# Altium PCB LED_BOARD.PcbDoc
Units mm, origin at the board's own origin, x right, y up, seen from the top; angles counter-clockwise.
Board outline 33.99 x 32.78 mm, 2 copper layers (Top Layer, Bottom Layer); 8 components, 11 nets, 24 pads, 0 vias.
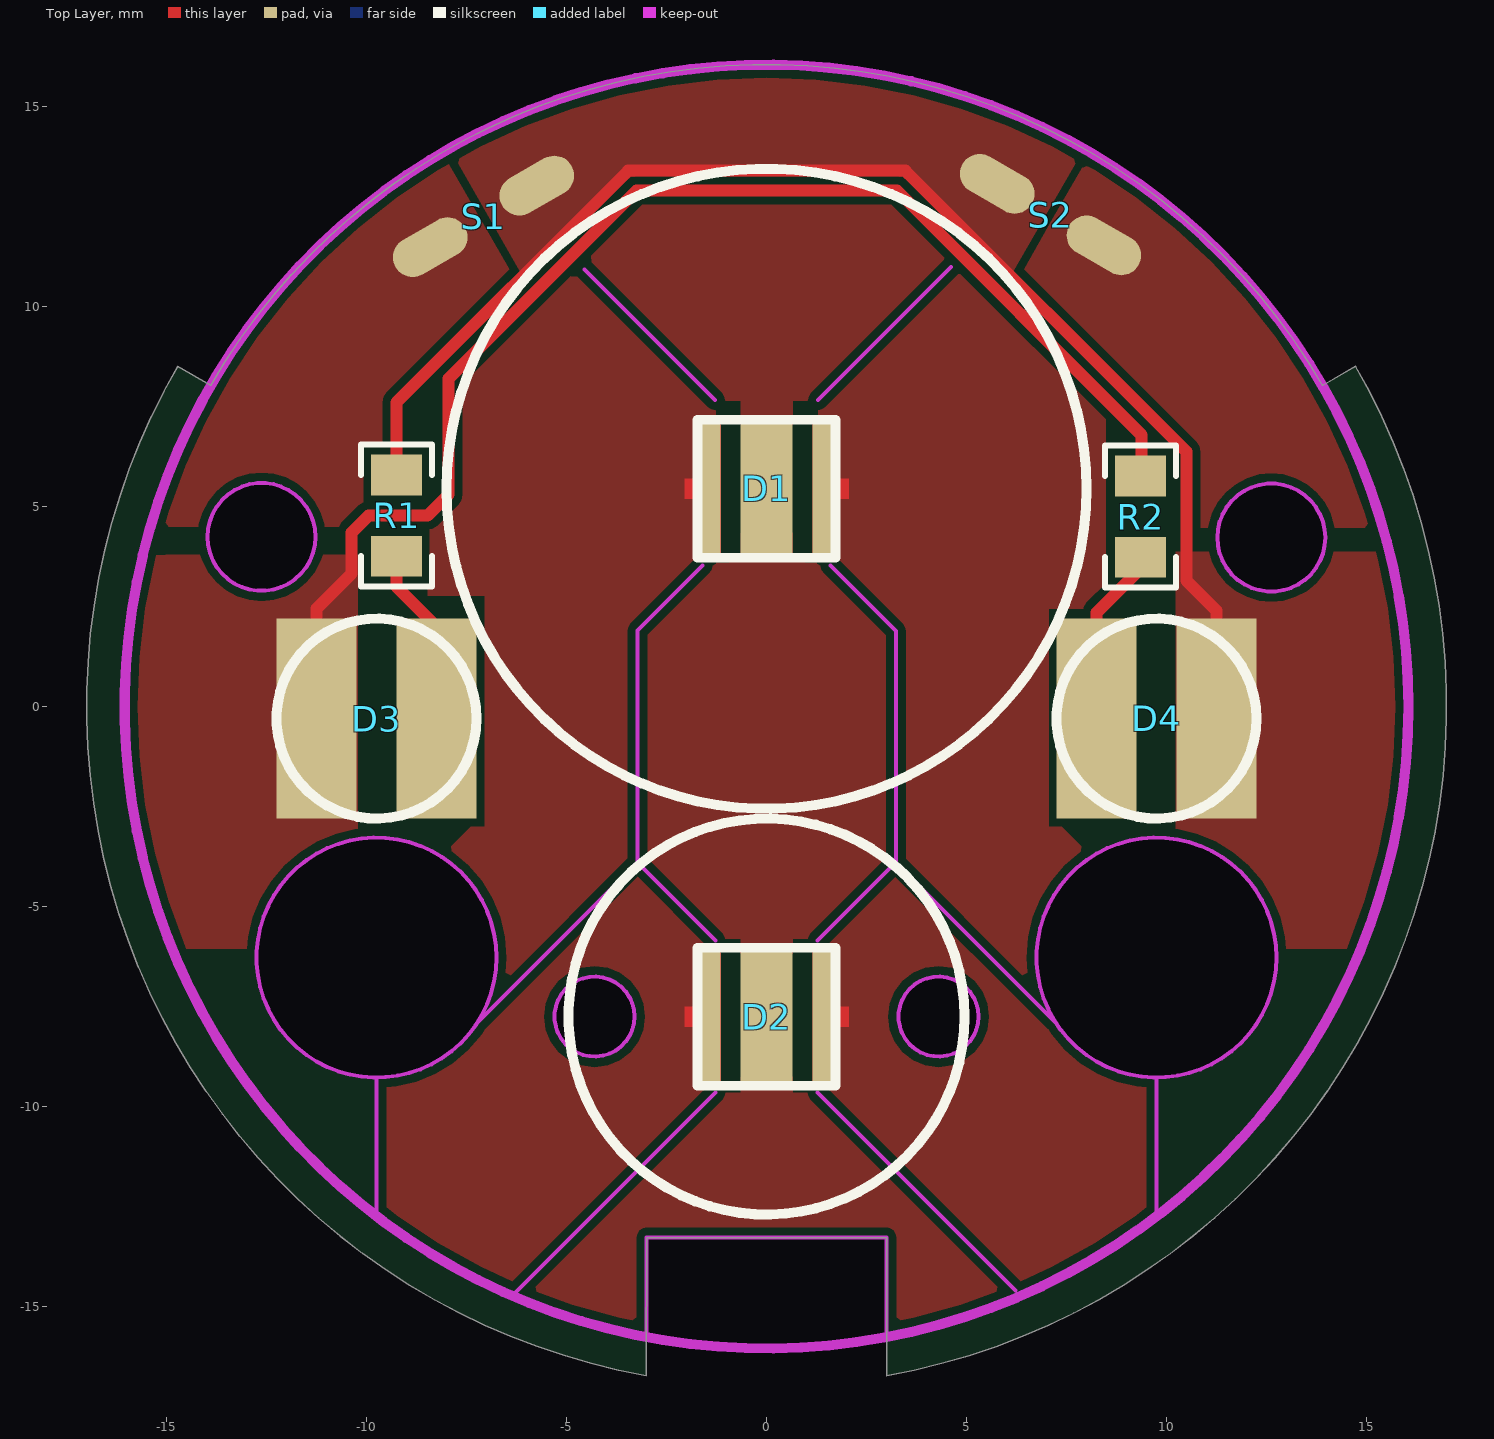
[diagram p0: Top Layer view]
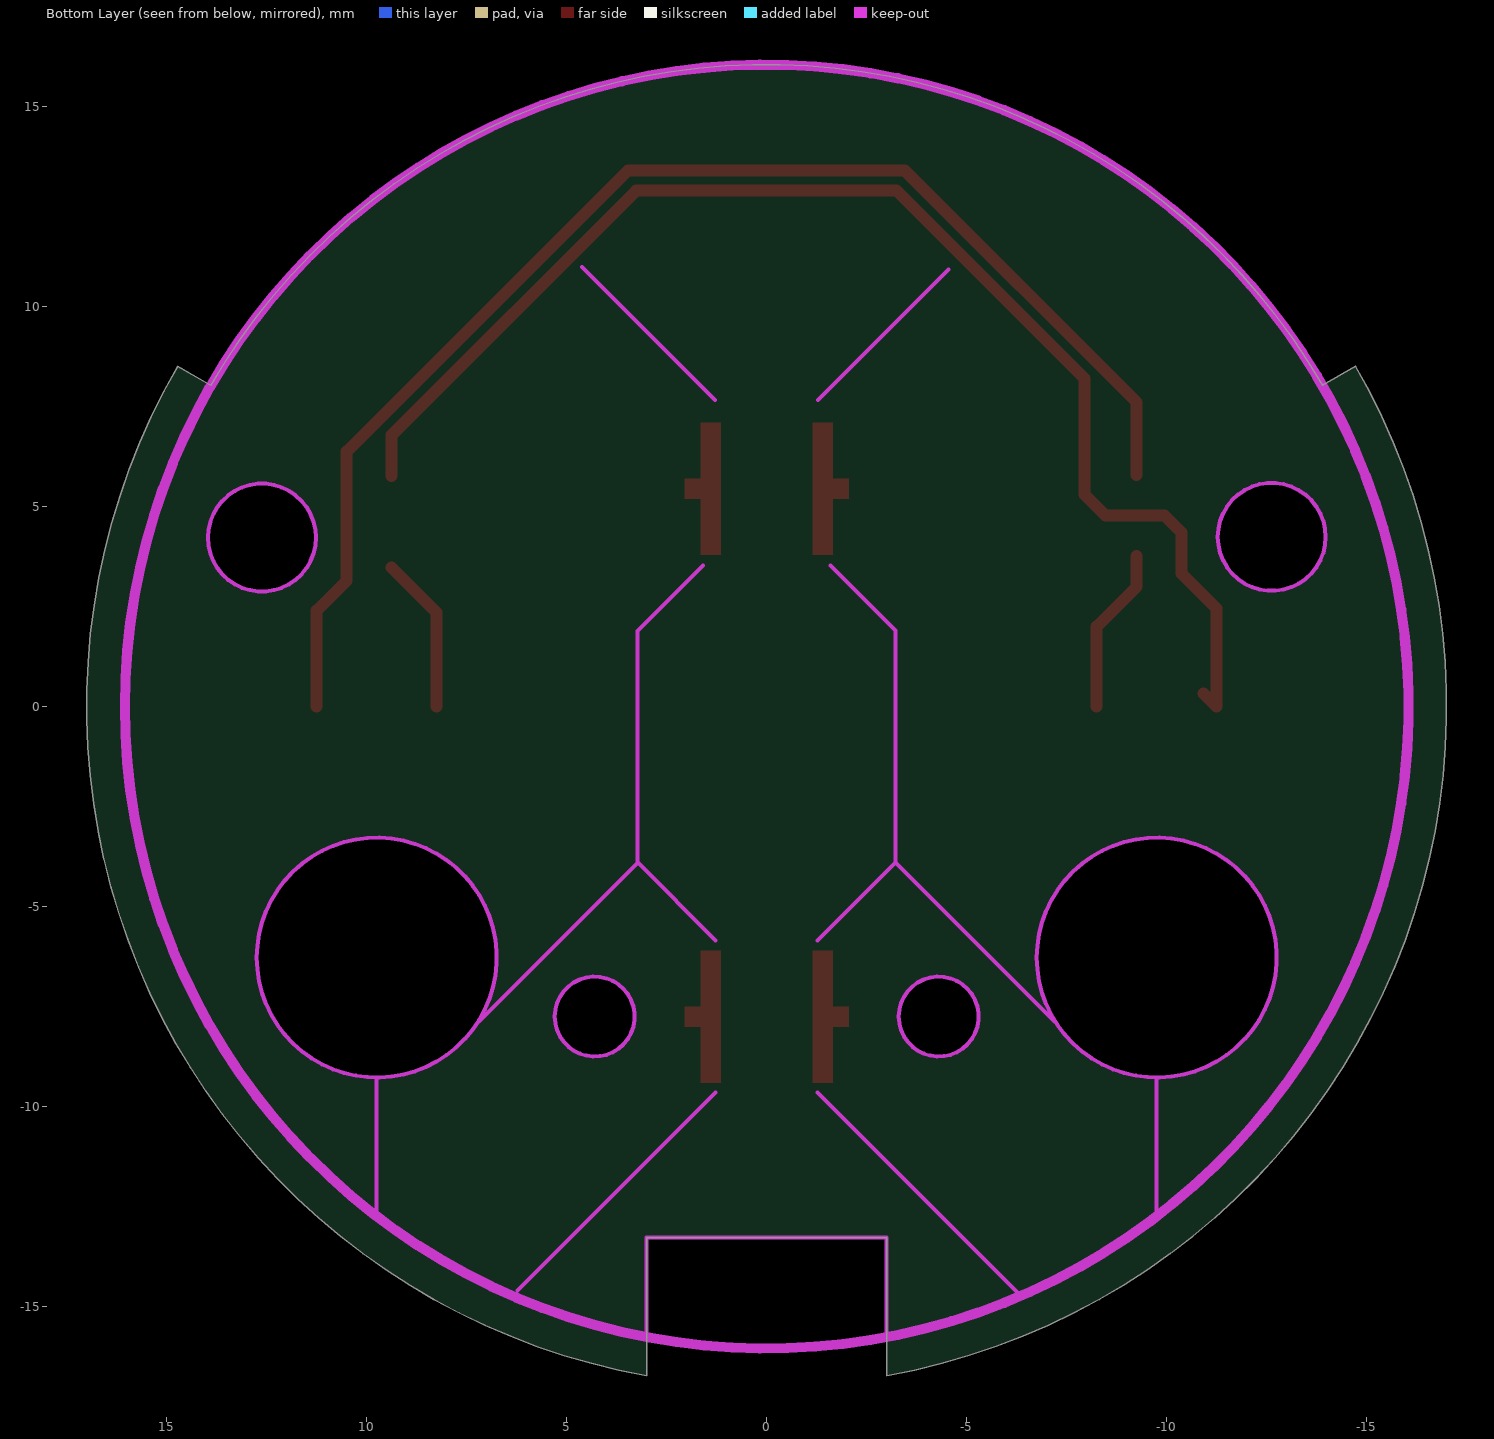
[diagram p1: Bottom Layer view, seen from below]

## Layer stack, top to bottom
Top Solder: solder mask 0.0102, Solder Resist, Dk 3.5
Top Layer: signal copper 0.0356
Dielectric1: dielectric 0.32, FR-4, Dk 4.8
Bottom Layer: signal copper 0.0356
Bottom Solder: solder mask 0.0102, Solder Resist, Dk 3.5

## Board outline
-3.003,-16.728 cw(c0.002,0.005) -14.72,8.505 -13.897,8.03 cw(c0,0) 13.898,8.027 14.725,8.505 cw(c0.002,0.005) 3,-16.729 3,-16.73 3,-13.275 -3,-13.275

## Design rules (kind name [scope] priority, off if disabled: settings)
Clearance [All] p1: gap=0.2
HoleSize [All] p1 off: absolutevalues=TRUE maxlimit=2.54 minlimit=0.025 maxpercent=80.000 minpercent=20.000
HoleToHoleClearance [All] p1 off: gap=0.254 allowstackedmicrovias=TRUE
LayerPairs [All] p1 off: enforce=TRUE
MinimumSolderMaskSliver [All] p1 off: minsoldermaskwidth=0.254
NetAntennae [All] p1 off: netantennaetolerance=0
PolygonConnect [All] p1: connectstyle=Direct reliefconductorwidth=0.254 reliefentries=4 polygonreliefangle="90 Angle" airgapwidth=0.254
RoutingVias [All] p1: holewidth=0.711 width=1.27 viastyle="Through Hole" minholewidth=0.711 minwidth=1.27 maxholewidth=0.711 maxwidth=1.27
SilkToSilkClearance [All] p1 off: silktosilkclearance=0.254
SilkToSolderMaskClearance SilkscreenOverComponentPads [IsPad] p1 off: minsilkscreentomaskgap=0.254 clearancetoexposedcopper=TRUE
SolderMaskExpansion [All] p1: expansion=0.102
Width [All] p1: maxlimit=2 minlimit=0.254 preferedwidth=0.254
23 further rules are at their usual default settings.

## Components (designator, comment, footprint, x,y, rotation, side; value= is the part's Value field where it differs from the comment)
D1 "LED0" PCBComponent_1 0,5.445 r0 top
D2 "LED0" PCBComponent_1 0,-7.75 r0 top
D3 "LED0" "LED 5MM" -9.75,-0.3 r0 top
D4 "LED0" "LED 5MM" 9.75,-0.3 r0 top
R1 "R_SMD_0805" 0805 -9.25,4.775 r0 top
R2 "R_SMD_0805" 0805 9.35,4.75 r180 top
S1 "SW-SPST" SPST-2#1 -7.075,12.254 r0 top
S2 "SW-SPST" SPST-2#2 7.101,12.3 r0 top

## Footprints (in the part's own frame and the unit in brackets; to place one, negate y for a bottom-side part, rotate by r counter-clockwise, add the part's x,y. Pads: shape width x height; smd on the part's side, far side on the other; paste and mask are expansions set on the pad)
0805 [mil]
  rect 50x40 smd: 1(0,40) 2(0,-40)
  silkscreen extent -35,-70 35,70
"LED 5MM" [mm]
  rect 2x5 smd: 1(-1.5,0) 2(1.5,0)
  silkscreen extent -2.5,-2.5 2.5,2.5
PCBComponent_1 [mm]
  rect 1.3x3.3 smd paste-0.2: 0(0,0)
  rect 0.5x3.3 smd paste-0.1: 1(1.4,0) 2(-1.4,0)
  Top Layer region: -2.05,0.25 -2.05,-0.25 -1.65,-0.25 -1.65,-1.65 -1.15,-1.65 -1.15,1.65 -1.65,1.65 -1.65,0.25
  Top Layer region: 2.05,-0.25 2.05,0.25 1.65,0.25 1.65,1.65 1.15,1.65 1.15,-1.65 1.65,-1.65 1.65,-0.25
  silkscreen extent -1.73,-1.73 1.73,1.73
SPST-2#1 [mm] "Switch; 2 Leads"
  oval 2x1 smd rot 30 paste-1: 1(-1.334,-0.77) 2(1.334,0.77)
SPST-2#2 [mm] "Switch; 2 Leads"
  oval 2x1 smd rot 150 paste-1: 1(-1.334,0.77) 2(1.334,-0.77)

## Part data
D1 D2 D3 D4: "Typical INFRARED GaAs LED"
R1 R2: "Резистор"
S1 S2: "Single-Pole, Single-Throw Switch"

## Free pads (board coordinates)
  round 6 hole 6 unplated: 0(9.75,-6.275) 1(-9.75,-6.275)
  round 2.7 hole 2.7 unplated: 2(-12.625,4.25) 3(12.625,4.25)
  round 2 hole 2 unplated: 4(4.3,-7.75) 5(-4.3,-7.75)

## Nets (pads, with @x,y where several pads share a name; then routed paths per layer and width w, separated by ;. In a path a pad name is that pad's centre, name@x,y a point inside that pad or via, vN(x,y) a via of type N, cw(c..) or ccw(c..) an arc to the next point about the centre after c; other vN are vias at no path point)
BTN1: S1.1
BTN2: S2.2
GND: D4.2 R1.1 S1.2 S2.1 | length 33.6
  Top Layer w0.3: R1.1 -9.25,7.607 -3.457,13.4 3.473,13.4 10.5,6.373 10.5,3.15 11.25,2.4 D4.2@11.25,0
H+: D1.1
H-: D1.2
L+: D2.1
L-: D2.2
NetD1_0: D1.0 D2.0
NetD3_2: D3.2 R1.2 | length 4.2
  Top Layer w0.3: R1.2 -9.25,3 -8.25,2 D3.2@-8.25,0
NetD4_1: D4.1 R2.1 | length 3.9
  Top Layer w0.3: D4.1@8.25,0 8.25,2.35 R2.1@9.375,3.475
RED+: D3.1 R2.2 | length 33.7
  Top Layer w0.3: D3.1@-10.925,0.325 -11.25,0 -11.25,2.45 -10.375,3.325 -10.375,4.35 -9.95,4.775 -8.475,4.775 -7.95,5.3 -7.95,8.2 -3.25,12.9 3.266,12.9 9.375,6.791 R2.2@9.375,5.766

## Polygon pours and split planes (outlines as drawn)
BTN2 on Top Layer "Bottom Layer-No Net" (solid, remove dead copper, pour order 52): 10.8,4.475 10.8,6.425 6.388,10.837 8.065,13.797 9.875,12.525 10.85,11.75 11.7,10.85 12.075,10.4 12.45,10 12.8,9.6 13.45,8.6 13.875,7.925 14.325,7.075 14.575,6.525 15,5.5 15.225,4.775 15.425,4.15 15.425,4.475
GND on Top Layer "Bottom Layer-No Net" (solid, remove dead copper, pour order 32): 6.016,10.634 3.4,13.25 -3.4,13.25 -5.775,10.875 -6.153,10.875 -8.17,14.386 -2.225,16.4 1.525,16.4 5.275,15.55 8.053,14.149
BTN1 on Top Layer "Bottom Layer-No Net" (solid, remove dead copper, pour order 56): -10.277,4.5 -15.375,4.5 -14.775,6.225 -14.1,7.575 -13.475,8.625 -11.7,10.95 -10.525,11.925 -8.55,13.525 -8.061,13.758 -6.204,10.527 -6.407,10.45 -9.25,7.607 -9.25,6.325
RED+ on Top Layer "Bottom Layer-No Net" (solid, remove dead copper, pour order 54): -15.025,3.8 -15.625,3.75 -15.7,2.95 -15.9,2.025 -15.975,1.25 -15.875,-2.25 -15.6,-3.675 -14.824,-6.05 -12.75,-6.05 -12.7,-5.75 -12.6,-5.375 -12.35,-4.775 -12.075,-4.4 -11.625,-3.925 -11.5,-3.825 -11.25,-3.675 -10.9,-3.5 -10.225,-3.325 -10.225,3.8
H+ on Top Layer "Bottom Layer-No Net" (solid, remove dead copper, pour order 30): 1.275,3.85 1.288,3.85 1.288,7.662 4.613,10.987 5.213,10.987 8.475,7.725 8.475,2.6 8.325,2.45 7.05,2.45 7.05,-2.675 7.975,-3.6 7.975,-7.1 7.198,-7.877 3.235,-3.915 3.235,1.89
H- on Top Layer "Bottom Layer-No Net" (solid, remove dead copper, pour order 46): -1.275,7.65 -4.875,11.275 -7.95,8.2 -7.95,5.3 -8.475,4.775 -8.475,2.775 -7.05,2.775 -7.05,-2.65 -8.15,-3.75 -8.15,-3.725 -8,-3.85 -7.975,-3.875 -7.775,-4.025 -7.575,-4.225 -7.4,-4.425 -7.25,-4.65 -7.1,-4.875 -7,-5.075 -6.925,-5.25 -6.8,-5.65 -6.775,-5.975 -6.75,-6.175 -6.75,-6.525 -6.8,-6.8 -6.925,-7.325 -7.05,-7.575 -7.2,-7.875 -3.225,-3.9 -3.225,1.913 -1.275,3.85
GND on Top Layer "Bottom Layer-No Net" (solid, remove dead copper, pour order 36): 10.225,3.875 16.37,3.875 17.075,-0.2 16.5,-4.35 15.7,-6.05 12.725,-6.05 12.725,-6.075 12.55,-5.175 12.425,-4.9 12.225,-4.6 11.875,-4.15 11.675,-3.975 11,-3.55 10.225,-3.325
L- on Top Layer "Bottom Layer-No Net" (solid, remove dead copper, pour order 34): -9.75,-12.625 -9.75,-9.3 -9.677,-9.3 ccw(c-9.677,-6.76) -7.881,-8.556 -7.2,-7.875 -3.25,-3.925 -1.275,-5.85 -1.275,-9.65 -6.325,-14.7 -9.75,-12.625
L+ on Top Layer "Bottom Layer-No Net" (solid, remove dead copper, pour order 44): 1.275,-9.65 1.275,-5.85 3.235,-3.915 7.198,-7.877 7.5,-8.275 7.725,-8.475 7.925,-8.65 8.075,-8.775 8.225,-8.85 8.375,-8.95 8.65,-9.05 8.95,-9.15 9.2,-9.225 9.4,-9.275 9.75,-9.3 9.75,-12.7 6.4,-14.775 6.225,-14.6 1.275,-9.65
NetD1_0 on Top Layer "Bottom Layer-No Net" (solid, remove dead copper, pour order 50): -1.275,-9.65 -6.1,-14.475 -6.1,-16.625 -5.25,-17.475 -4.691,-16.916 4.709,-16.916 6.225,-15.4 6.225,-14.6 1.275,-9.65 0.65,-9.65 0.65,-9.25 -0.65,-9.25 -0.65,-9.65
NetD1_0 on Top Layer "Bottom Layer-No Net" (solid, remove dead copper, pour order 48): -1.275,7.65 -0.65,7.65 -0.65,7.061 0.65,7.061 0.65,7.65 1.275,7.65 4.813,11.187 3.25,12.75 -3,12.75 -4.688,11.062 -1.288,7.662
NetD1_0 on Top Layer "Bottom Layer-No Net" (solid, remove dead copper, pour order 60): -0.65,-5.8 -1.376,-5.8 -3.225,-3.975 -3.225,1.9 -1.518,3.607 -0.65,3.607 -0.65,4.35 0.65,4.35 0.65,3.607 1.518,3.607 3.225,1.9 3.225,-3.875 1.3,-5.8 0.65,-5.8 0.65,-6.175 -0.65,-6.175

## Keep-outs
Keep-Out Layer:
  circle w0.1: c-4.3,-7.75 r1
  circle w0.1: c9.75,-6.275 r3
  circle w0.1: c-9.75,-6.275 r3
  circle w0.1: c4.3,-7.75 r1
  circle w0.1: c-12.625,4.242 r1.35
  circle w0.1: c12.62,4.225 r1.35
  circle w0.254: c0,0 r16.046
  lines w0.1: -9.75,-12.625 -9.75,-9.3 ; -7.2,-7.875 -3.225,-3.9 ; -6.325,-14.7 -1.275,-9.65 ; -4.55,10.925 -1.288,7.662 ; -3,-15.7 -3,-13.275 3,-13.275 3,-15.725 ; -1.597,3.528 -3.225,1.9 -3.225,-3.9 ; -1.275,-5.85 -3.225,-3.9 ; 1.275,-9.65 6.225,-14.6 ; 1.275,-5.85 3.235,-3.89 3.235,-1.69 3.235,1.89 1.597,3.528 ; 1.288,7.662 4.613,10.987 ; 3.235,-3.915 7.198,-7.877 ; 9.75,-12.7 9.75,-9.3

## Silkscreen, mask and mechanical layers (free items; w line width, h text height)
Top Overlay:
  circle w0.254: c0,-7.75 r4.95
  circle w0.254: c0,5.445 r8
Top Solder:
  region: 11.282,10.725 7.491,12.914 6.612,11.391 10.403,9.202
  region: 7.425,12.979 3.99,14.962 3.106,13.43 6.54,11.447
  region: -6.548,11.443 -3.106,13.43 -3.99,14.962 -7.433,12.974
  region: -10.384,9.237 -6.641,11.398 -7.52,12.921 -11.264,10.76
  region: -5.825,-1.425 -3.48,-3.794 -6.414,-6.729 -6.542,-6.67 -6.511,-6.273 -6.551,-5.763 -6.671,-5.266 -6.866,-4.793 -7.134,-4.357 -7.466,-3.968 -7.855,-3.636 -7.878,-3.621 -7.893,-3.495
  region: -9.634,7.616 -11.671,5.579 -11.732,5.579 -12.01,5.728 -12.311,5.819 -12.625,5.85 -12.939,5.819 -13.24,5.728 -13.518,5.579 -13.756,5.812 -13.756,7.338 -11.556,9.538
  region: 9.701,7.676 11.702,5.675 11.725,5.675 11.727,5.562 12.005,5.71 12.306,5.802 12.62,5.833 12.933,5.802 13.235,5.71 13.513,5.562 13.75,5.799 13.75,7.325 11.55,9.525
  region: -12.25,0 -15.599,0 -15.599,-0.025 -15.575,-0.65 -15.551,-1.249 -15.407,-2.465 -15.174,-3.638 -15.168,-3.667 -15.083,-3.97 -14.85,-4.795 -14.836,-4.845 -14.497,-5.765 -14.412,-5.995 -14.386,-6.05 -12.992,-6.05 -12.97,-5.765 -12.85,-5.268 -12.676,-4.845 -12.387,-4.359 -12.055,-3.97 -11.7,-3.667 -11.23,-3.37 -10.757,-3.175 -10.15,-3.035 -10.15,-0.026
  region: -9.497,-12.383 -9.497,-9.51 -9.242,-9.49 -8.745,-9.371 -8.272,-9.175 -7.836,-8.908 -7.447,-8.575 -7.115,-8.186 -7.044,-8.072 -7.043,-8.07 -6.902,-8.07 -3.483,-11.49 -6.282,-14.289 -7.084,-13.919 -8.153,-13.321 -9.171,-12.64
  region: 9.495,-12.388 9.495,-9.515 9.24,-9.495 8.743,-9.375 8.27,-9.18 7.834,-8.912 7.445,-8.58 7.113,-8.191 7.042,-8.076 7.041,-8.075 6.9,-8.075 3.48,-11.495 6.28,-14.294 7.082,-13.924 8.151,-13.326 9.169,-12.645
  region: 5.751,-1.376 3.49,-3.638 3.49,-3.809 6.406,-6.725 6.521,-6.672 6.49,-6.275 6.53,-5.765 6.65,-5.268 6.845,-4.795 7.113,-4.359 7.445,-3.97 7.834,-3.638 7.857,-3.623 7.872,-3.497
  region: 12.25,0 15.599,0 15.599,-0.025 15.575,-0.65 15.551,-1.249 15.407,-2.465 15.174,-3.638 14.85,-4.795 14.386,-6.05 12.992,-6.05 12.97,-5.765 12.85,-5.268 12.676,-4.845 12.387,-4.359 12.055,-3.97 11.7,-3.667 11.23,-3.37 10.757,-3.175 10.15,-3.035 10.15,-0.026
Mechanical 1:
  circle w0.1: c-4.3,-7.75 r1
  circle w0.1: c9.75,-6.275 r3
  circle w0.1: c-9.75,-6.275 r3
  circle w0.1: c4.3,-7.75 r1
  circle w0.1: c-12.625,4.242 r1.35
  circle w0.1: c12.62,4.25 r1.35
  lines w0.1: -3.003,-16.728 cw(c0.002,0.005) -14.72,8.505 -13.854,8.005 cw(c0,0) 13.855,8.002 14.725,8.505 cw(c0.002,0.005) 3,-16.729 ; -3,-16.728 -3,-13.275 3,-13.275 3,-16.73
Mechanical 4:
  rectangle: -12.25,-2.5 -10.25,2.5
  rectangle: -9.25,-2.5 -7.25,2.5
  rectangle: -1.626,-6.934 -1.168,-6.198
  rectangle: -0.457,-9.195 0.457,-8.56
  rectangle: -0.457,-8.077 0.457,-7.391
  rectangle: -0.457,-6.934 0.457,-6.299
  rectangle: 10.257,-2.5 12.257,2.5
  rectangle: 7.257,-2.5 9.257,2.5
  rectangle: 8.788,5.309 9.931,6.223
  rectangle: 8.788,3.277 9.931,4.191
  rectangle: -9.83,3.302 -8.687,4.216
  rectangle: -9.83,5.334 -8.687,6.248
  rectangle: -1.626,-9.296 -1.168,-8.56
  rectangle: 1.168,-9.296 1.626,-8.56
  rectangle: 1.168,-6.934 1.626,-6.198
  rectangle: 1.168,6.579 1.626,7.315
  rectangle: 1.168,4.216 1.626,4.953
  rectangle: -1.626,4.216 -1.168,4.953
  rectangle: -0.457,6.579 0.457,7.214
  rectangle: -0.457,5.436 0.457,6.121
  rectangle: -0.457,4.318 0.457,4.953
  rectangle: -1.626,6.579 -1.168,7.315
Mechanical 15:
  lines w0.1: -1.275,-5.85 -1.275,-9.65 1.275,-9.65 1.275,-5.85 ; -1.275,-5.846 1.271,-5.846 ; -1.275,7.65 -1.275,3.85 1.275,3.85 1.275,7.65 ; -1.275,7.654 1.271,7.654 ; -7.5,12.99 cw(c0,0) 7.5,12.99 0,0 -7.5,12.99

## Dimensions
-16.05,0 to -112,-75 on Mechanical 3